# Altium PCB AnySkin.PcbDoc
Units mil, origin at the board's own origin, x right, y up, seen from the top; angles counter-clockwise.
Board outline 1025 x 1725 mil, 2 copper layers (Top Layer, Bottom Layer); 41 components, 20 nets, 191 pads, 66 vias.
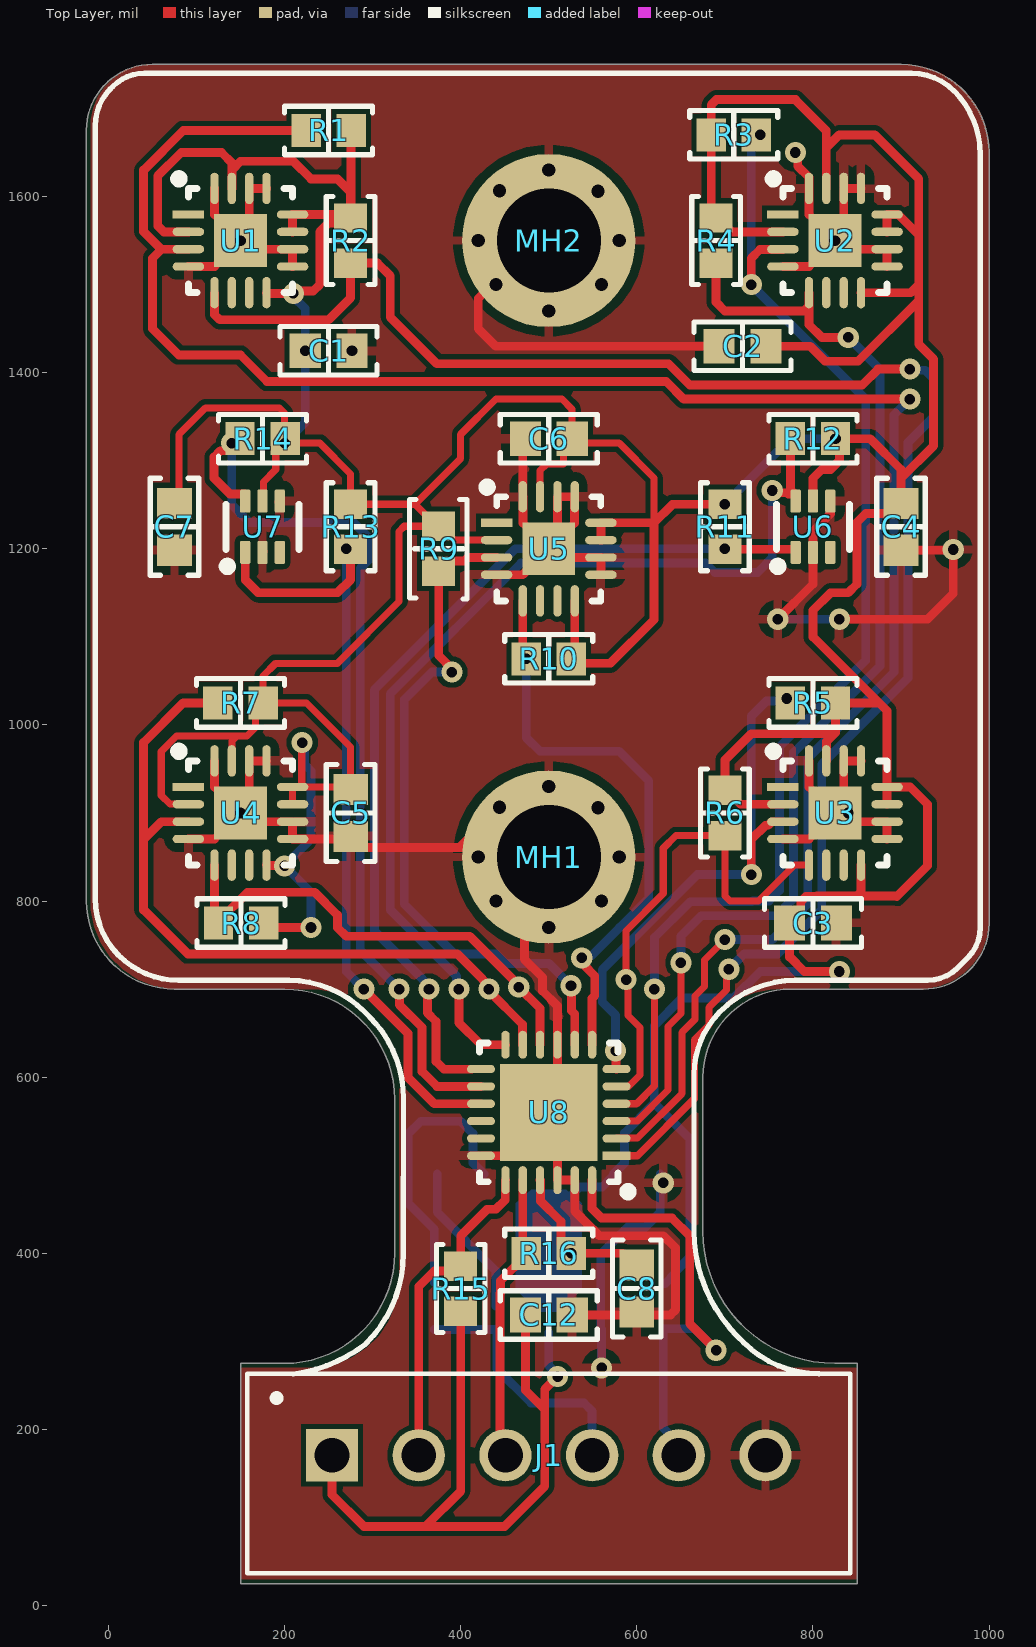
[diagram p0: Top Layer view]
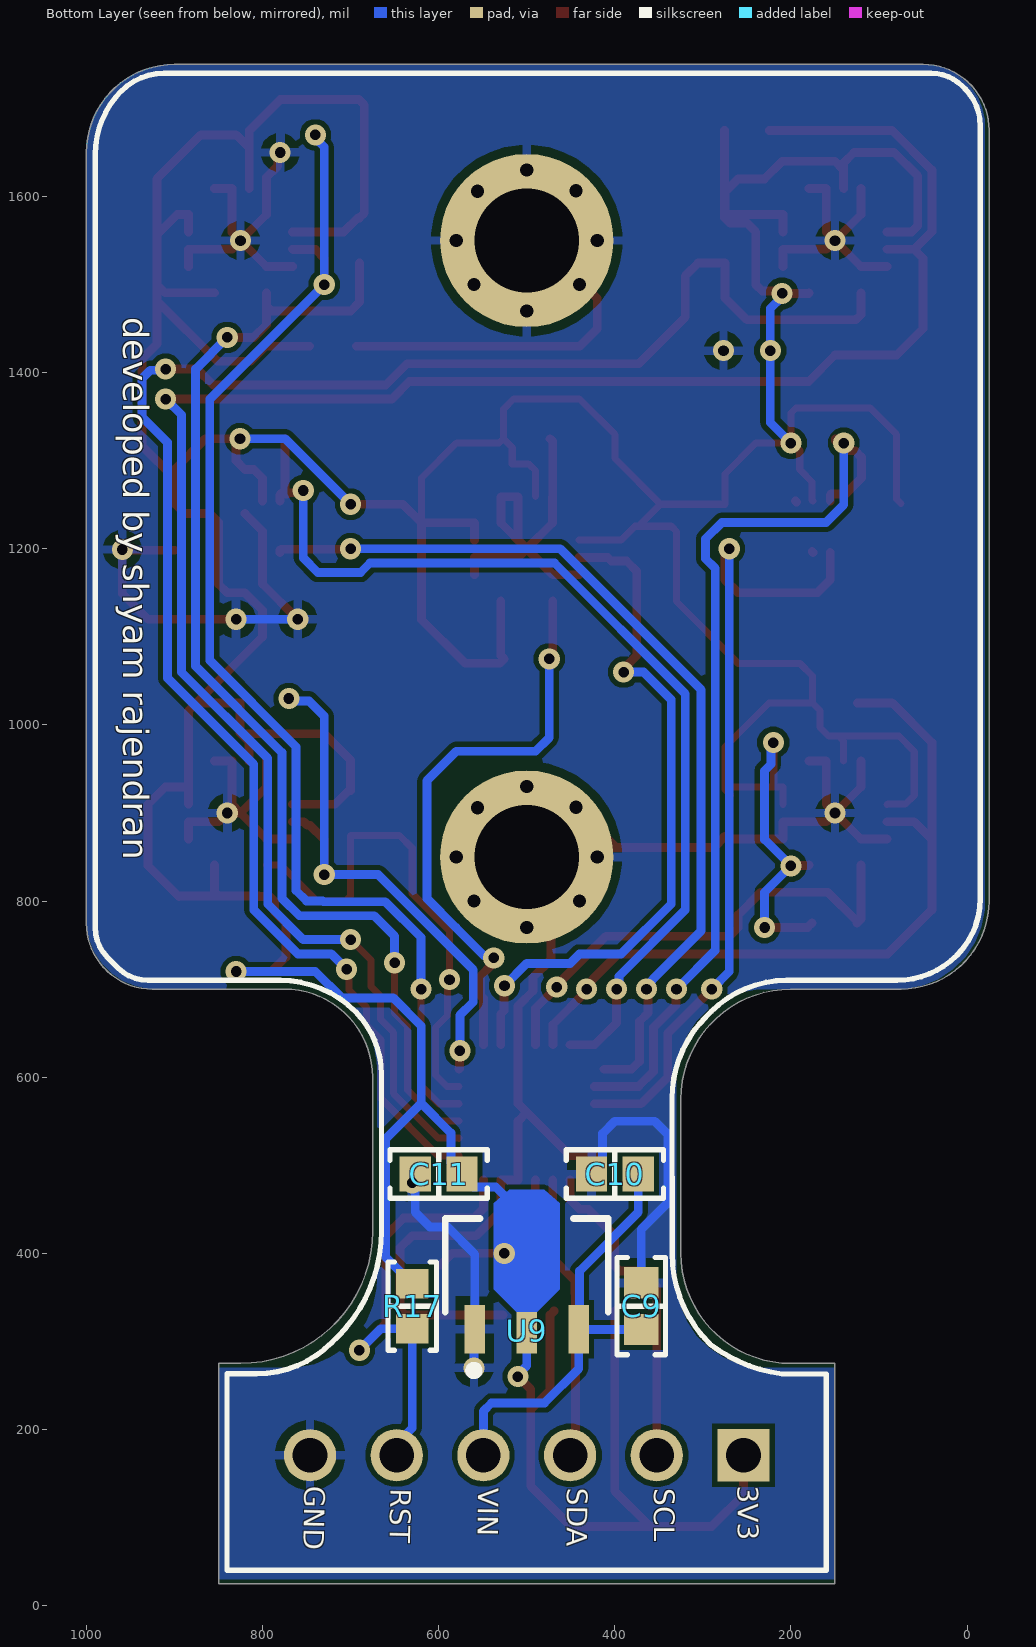
[diagram p1: Bottom Layer view, seen from below]
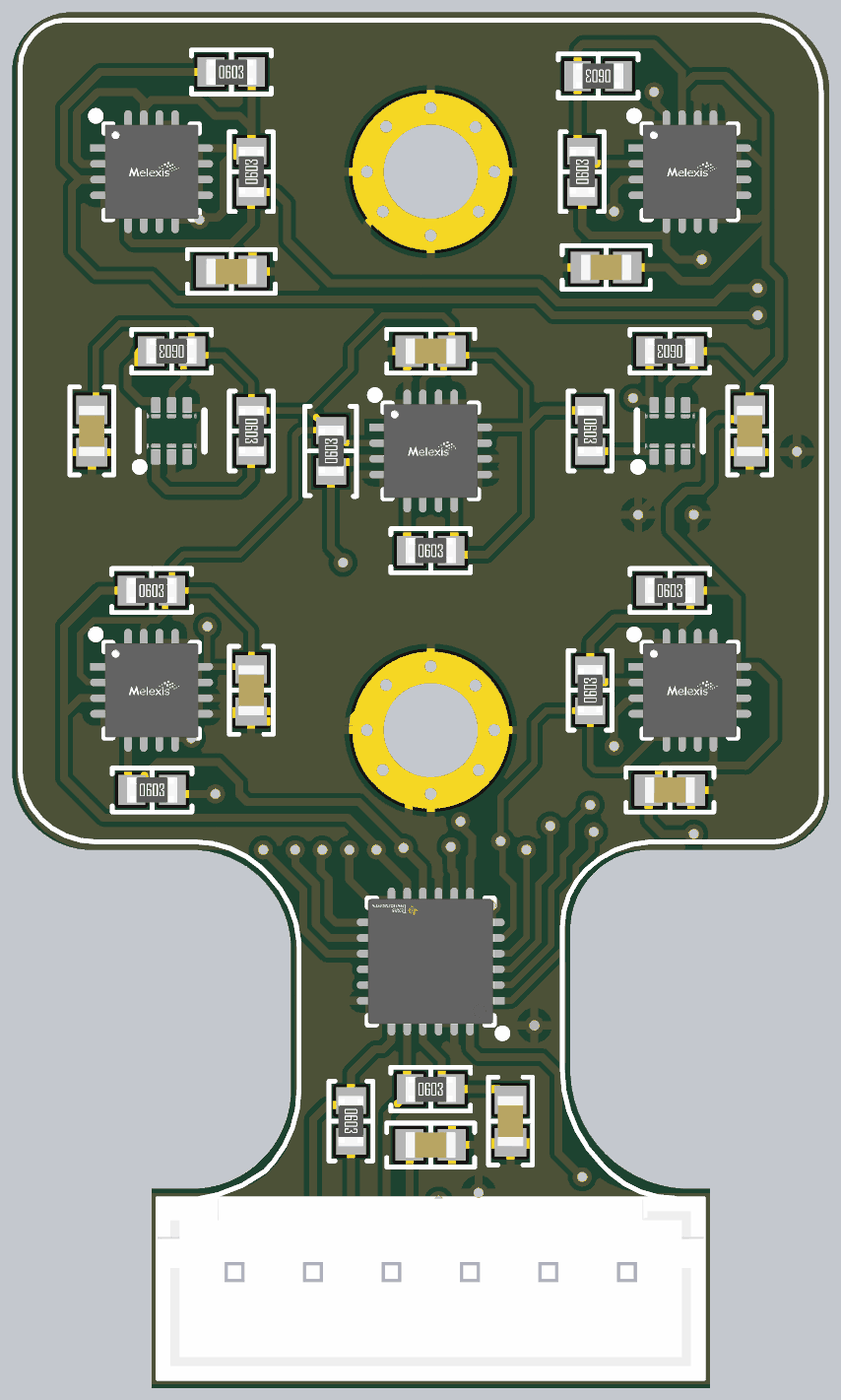
[diagram p2: 3D render of the assembled board from above, using the file's embedded part models]
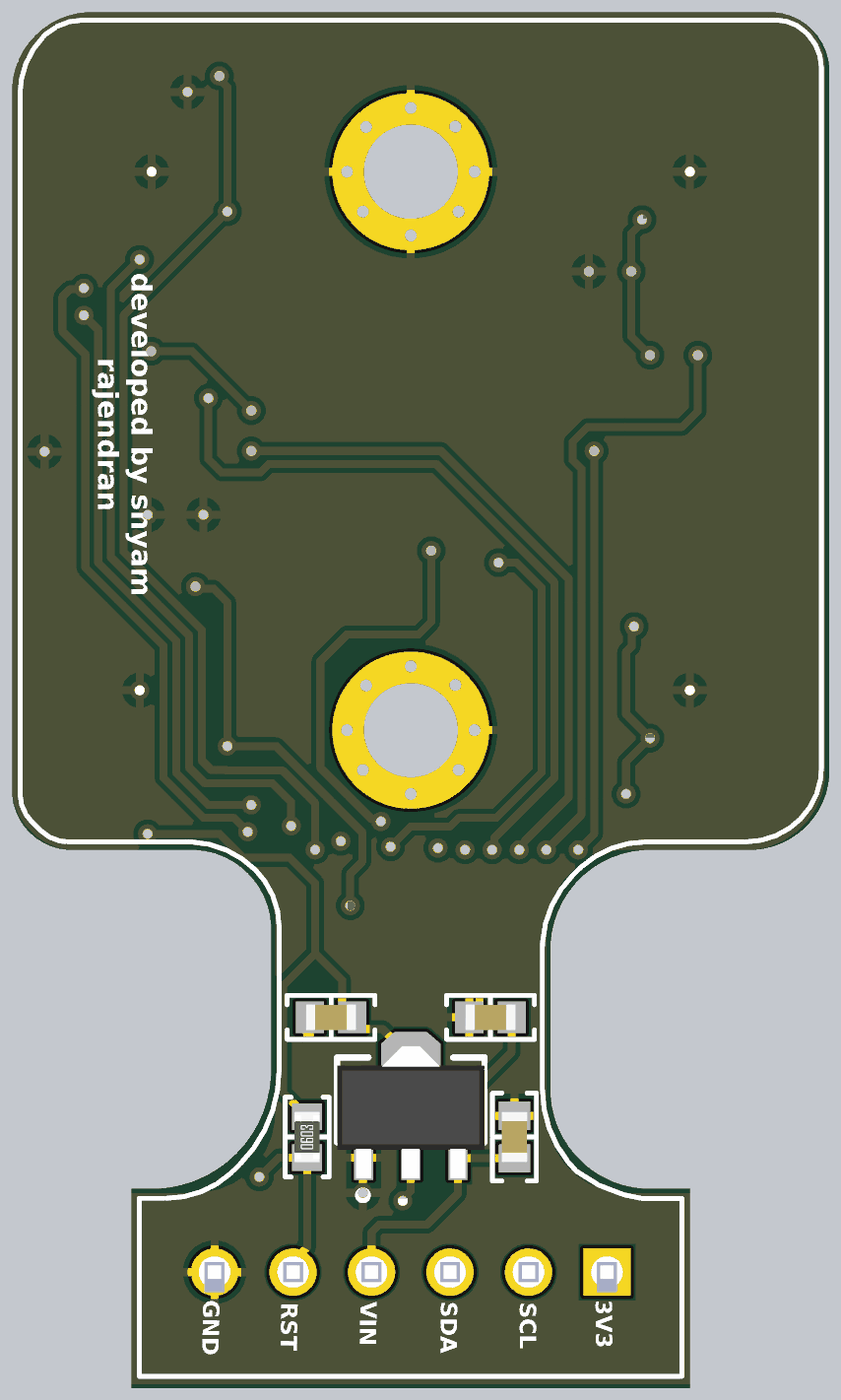
[diagram p3: 3D render of the assembled board from below, using the file's embedded part models]

## Layer stack, top to bottom
Top Solder: solder mask 0.4, Solder Resist, Dk 3.5
Top Layer: signal copper 1.4
Dielectric 1: dielectric 12.6, FR-4, Dk 4.8
Bottom Layer: signal copper 1.4
Bottom Solder: solder mask 0.4, Solder Resist, Dk 3.5

## Board outline
200,275 150,275 150,25 850,25 850,275 825,275 cw(c825,425) 675,425 675,600 cw(c775,600) 775,700 925,700 ccw(c925,775) 1000,775 1000,1650 ccw(c900,1650) 900,1750 50,1750 ccw(c50,1675) -25,1675 -25,800 ccw(c75,800) 75,700 200,700 cw(c200,575) 325,575 325,400 cw(c200,400)

## Design rules (kind name [scope] priority, off if disabled: settings)
Clearance [All] p1: gap=6 ignorepadtopadclearanceinfootprint=TRUE
HoleSize [All] p1: absolutevalues=TRUE maxlimit=236.22 minlimit=0.98 maxpercent=80.000 minpercent=20.000
MinimumSolderMaskSliver MinimumSolderMaskSliver_1 [All] p1: minsoldermaskwidth=10
MinimumSolderMaskSliver "QFN relaxation" [InRoom('SliverRoom')] p2: minsoldermaskwidth=6
PolygonConnect [All] p1: connectstyle=Relief reliefconductorwidth=10 reliefentries=4 polygonreliefangle="90 Angle" airgapwidth=10
RoomDefinition SliverRoom [False] p1: confinementstyle=ConfineIn formatcopy=TRUE lockcomponents=FALSE outline 398,662 604,662 604,451 398,451
RoutingVias [All] p1: holewidth=24 width=24 viastyle="Through Hole" minholewidth=12 minwidth=20 maxholewidth=13 maxwidth=40
SilkToSolderMaskClearance [IsPad] p1: minsilkscreentomaskgap=5.9 clearancetoexposedcopper=TRUE
SolderMaskExpansion [All] p1: expansion=4 istentingtop=FALSE
SupplyNets "Schematic Supply Nets_2" [InNet('VIN')] p1: voltage=0.000
SupplyNets "Schematic Supply Nets_1" [InNet('GND')] p2: voltage=0.000
SupplyNets "Schematic Supply Nets" [InNet('+3V3')] p3: voltage=0.000
Width [All] p1: maxlimit=20 minlimit=8 preferedwidth=10
27 further rules are at their usual default settings.

## Classes and differential pairs
component class "Sensor Suite": C1 C2 C3 C4 C5 C6 C7 R1 R2 R3 R4 R5 R6 R7 R8 R9 R10 R11 R12 R13 R14 U1 U2 U3 U4 U5 U6 U7
component class Interface: C8 C9 C10 C11 C12 J1 MH1 MH2 R15 R16 R17 U8 U9

## Components (designator, comment, footprint, x,y, rotation, side; value= is the part's Value field where it differs from the comment)
C1 "10uF" "CAP 0603_1608" 250,1425 r180 top value="3.3 µF"
C2 "10uF" "CAP 0603_1608" 720,1430 r0 top value="3.3 µF"
C3 "10uF" "CAP 0603_1608" 800,775 r180 top value="3.3 µF"
C4 "10uF" "CAP 0603_1608" 900,1225 r90 top value="3.3 µF"
C5 "10uF" "CAP 0603_1608" 275,900 r90 top value="3.3 µF"
C6 "10uF" "CAP 0603_1608" 500,1325 r0 top value="3.3 µF"
C7 "10uF" "CAP 0603_1608" 75,1225 r90 top value="3.3 µF"
C8 "10uF" "CAP 0603_1608" 600,360 r90 top value="3.3 µF"
C9 "10uF" "CAP 0603_1608" 370,340 r270 bottom value="3.3 µF"
C10 "10uF" "CAP 0603_1608" 400,490 r180 bottom value="3.3 µF"
C11 "10uF" "CAP 0603_1608" 600,490 r180 bottom value="3.3 µF"
C12 "10uF" "CAP 0603_1608" 500,330 r180 top value="3.3 µF"
J1 "B6B-XH-A(LF)(SN)" JST_B6B-XH-A(LF)(SN) 500,150 r180 top locked
MH1 "PMH 3.0" NPMH 500,850 r0 top
MH2 "PMH 3.0" NPMH 500,1550 r0 top
R1 "10k" "RES 0603_1608" 250,1675 r0 top
R2 "10k" "RES 0603_1608" 275,1550 r90 top
R3 "10k" "RES 0603_1608" 710,1670 r180 top
R4 "10k" "RES 0603_1608" 690,1550 r90 top
R5 "10k" "RES 0603_1608" 800,1025 r0 top
R6 "10k" "RES 0603_1608" 700,900 r90 top
R7 "10k" "RES 0603_1608" 150,1025 r0 top
R8 "10k" "RES 0603_1608" 150.59,775 r0 top
R9 "10k" "RES 0603_1608" 375,1200 r90 top
R10 "10k" "RES 0603_1608" 500,1075 r0 top
R11 "5.1K" "RES 0603_1608" 700,1225 r270 top value=5.1k
R12 "5.1K" "RES 0603_1608" 800,1325 r180 top value=5.1k
R13 "5.1K" "RES 0603_1608" 275,1225 r270 top value=5.1k
R14 "5.1K" "RES 0603_1608" 175,1325 r180 top value=5.1k
R15 "5.1K" "RES 0603_1608" 400,360 r270 top value=5.1k
R16 "5.1K" "RES 0603_1608" 500,400 r0 top value=5.1k
R17 "5.1K" "RES 0603_1608" 630,340 r90 bottom value=5.1k
U1 "MLX90393" MLX90393 150,1550 r0 top
U2 "MLX90393" MLX90393 825,1550 r0 top
U3 "MLX90393" MLX90393 825,900 r0 top
U4 "MLX90393" MLX90393 150,900 r0 top
U5 "MLX90393" MLX90393 500,1200 r0 top
U6 "TMP102" TMP102 800,1225 r90 top
U7 "TMP102" TMP102 175,1225 r90 top
U8 "TCA9548ARGERQ1" TCA9548 500,560 r180 top
U9 "AMS1117-3V3" "AMS1117, 5V" 500,376.93 r90 bottom locked

## Footprints (in the part's own frame and the unit in brackets; to place one, negate y for a bottom-side part, rotate by r counter-clockwise, add the part's x,y. Pads: shape width x height; smd on the part's side, far side on the other; paste and mask are expansions set on the pad)
"AMS1117, 5V" [mm] "SOT89"
  rect 1.4x0.6 smd: 1(-1.6,1.5) 3(-1.6,-1.5)
  rect 1.2x0.6 smd: 2(-1.7,0)
  Top Layer region: -1.1,0.3 -0.45,0.95 2.032,0.95 2.413,0.508 2.413,-0.508 2.032,-0.95 -0.45,-0.95 -1.1,-0.3
  silkscreen extent -2.92,-2.35 1.6,2.35, body extent -2.25,-2.35 1.95,2.35, height 1.6
"CAP 0603_1608" [mm] "Chip Capacitor, 2-Leads, Body 1.60x0.80mm, IPC Medium Density"
  rect 0.9x1 smd: 1(-0.675,0) 2(0.675,0)
  silkscreen extent -1.4,-0.7 1.4,0.7, body extent -0.8,-0.41 0.8,0.41, height 0.82
JST_B6B-XH-A(LF)(SN) [mm]
  rect 1.508x1.508 / inner round 1.508 / far side rect 1.508x1.508 hole 1: 1(6.25,-0.525)
  round 1.508 hole 1: 2(3.75,-0.525) 3(1.25,-0.525) 4(-1.25,-0.525) 5(-3.75,-0.525) 6(-6.25,-0.525)
  silkscreen extent -8.7,-2.88 8.7,2.88, body extent -8.7,-2.88 8.7,2.88, height 7
MLX90393 [mm] "QFN"
  rect 0.906x0.239 smd paste+0 mask+0: 1(-1.503,0.75)
  rrect100% 0.906x0.239 smd paste+0 mask+0: 2(-1.503,0.25) 3(-1.503,-0.25) 4(-1.503,-0.75) 9(1.503,-0.75) 10(1.503,-0.25) 11(1.503,0.25) 12(1.503,0.75)
  rrect100% 0.239x0.906 smd paste+0 mask+0: 5(-0.75,-1.503) 6(-0.25,-1.503) 7(0.25,-1.503) 8(0.75,-1.503) 13(0.75,1.503) 14(0.25,1.503) 15(-0.25,1.503) 16(-0.75,1.503)
  rect 1.524x1.524 smd paste-1000 mask+0: 17(0,0)
  silkscreen extent -1.9,-1.5 1.5,1.9, body extent -2.46,-2.46 2.46,2.46, height 0.25
NPMH [mm] "3.5mm"
  round 5 hole 3: GND(0,0)
"RES 0603_1608" [mm] "Chip Resistor, 2-Leads, Body 1.60x0.80mm, IPC Medium Density"
  rect 0.85x0.95 smd: 1(-0.65,0) 2(0.65,0)
  silkscreen extent -1.27,-0.7 1.27,0.7, body extent -0.8,-0.4 0.8,0.4, height 0.45
TCA9548 [mm] "QFN"
  rect 0.806x0.239 smd paste+0 mask+0: 1(-1.953,1.25)
  rrect100% 0.806x0.239 smd paste+0 mask+0: 2(-1.953,0.75) 3(-1.953,0.25) 4(-1.953,-0.25) 5(-1.953,-0.75) 6(-1.953,-1.25) 13(1.953,-1.25) 14(1.953,-0.75) 15(1.953,-0.25) 16(1.953,0.25) 17(1.953,0.75) 18(1.953,1.25)
  rrect100% 0.239x0.806 smd paste+0 mask+0: 7(-1.25,-1.953) 8(-0.75,-1.953) 9(-0.25,-1.953) 10(0.25,-1.953) 11(0.75,-1.953) 12(1.25,-1.953) 19(1.25,1.953) 20(0.75,1.953) 21(0.25,1.953) 22(-0.25,1.953) 23(-0.75,1.953) 24(-1.25,1.953)
  rect 2.8x2.8 smd paste-1000 mask+0: 25(0,0)
  silkscreen extent -2.41,-2 2,2.41, body extent -2.61,-2.61 2.61,2.61, height 0.25
TMP102 [mm] "SOT563"
  rrect33% 0.67x0.3 smd paste+0 mask+0: 1(-0.74,0.5) 2(-0.74,0) 3(-0.74,-0.5) 4(0.74,-0.5) 5(0.74,0) 6(0.74,0.5)
  silkscreen extent -1.27,-1.05 0.65,1.14, body extent -1.17,-1.1 1.17,1.1, height 0.25

## Part data
C1 C2 C3 C4 C5 C6 C7 C8 C9 C12: library part GCJ188C70J335KE02D, "0603", Capacitance=0.1uF, Device Package="0603 (1608 Metric)", Manufacturer="Murata Electronics", Operating Temperature="-55°C ~ 125°C", Ratings=AEC-Q200, Supplier Part Number 1=490-GCJ188C70J335KE02DCT-ND, Temperature Coefficient=X7S, Tolerance=±10%, Voltage - Rated=6.3V, Applications="Automotive, Boardflex Sensitive", ComponentLink1Description=Datasheet, ComponentLink1URL=https://search.murata.co.jp/Ceramy/image/img/A01X/G101/ENG/GCJ188C70J335KE02-01A.pdf, ComponentLink2Description="DigiKey Link", ComponentLink2URL=https://www.digikey.com/en/products/detail/murata-electronics/GCJ188C70J335KE02D/10696585, Features="Soft Termination", lastupdated="09-02-2024 20:08:53", Lifecycle Status=Active, Minimum Order=1, Mounting Type="Surface Mount, MLCC", Package / Case="0603 (1608 Metric)", Packaging=TapeAndReel, Part Number=GCJ188C70J335KE02D, Part Status=Active, partid=55427, Price=0.04, Series=GCJ, Size / Dimension="0.063\" L x 0.031\" W (1.60mm x 0.80mm)", Supplier 1=DigiKey, Thickness (Max)="0.039\" (1.00mm)"
C10 C11: library part GCJ188C70J335KE02D, "0603", Device Package="0603 (1608 Metric)", Manufacturer="Murata Electronics", Operating Temperature="-55°C ~ 125°C", Ratings=AEC-Q200, Supplier Part Number 1=490-GCJ188C70J335KE02DCT-ND, Temperature Coefficient=X7S, Tolerance=±10%, Voltage - Rated=6.3V, Applications="Automotive, Boardflex Sensitive", Capacitance=10uF, ComponentLink1Description=Datasheet, ComponentLink1URL=https://search.murata.co.jp/Ceramy/image/img/A01X/G101/ENG/GCJ188C70J335KE02-01A.pdf, ComponentLink2Description="DigiKey Link", ComponentLink2URL=https://www.digikey.com/en/products/detail/murata-electronics/GCJ188C70J335KE02D/10696585, Features="Soft Termination", lastupdated="09-02-2024 20:08:53", Lifecycle Status=Active, Minimum Order=1, Mounting Type="Surface Mount, MLCC", Package / Case="0603 (1608 Metric)", Packaging=TapeAndReel, Part Number=GCJ188C70J335KE02D, Part Status=Active, partid=55427, Price=0.04, Series=GCJ, Size / Dimension="0.063\" L x 0.031\" W (1.60mm x 0.80mm)", Supplier 1=DigiKey, Thickness (Max)="0.039\" (1.00mm)"
J1: "Connector Header Through Hole 6 position 0.098 (2.50mm)", Package=None, Check_prices=https://www.snapeda.com/parts/B6B-XH-A(LF)(SN)/JST+Sales+America+Inc./view-part/?ref=eda, MF="JST Sales", MP=B6B-XH-A(LF)(SN), SnapEDA_Link=https://www.snapeda.com/parts/B6B-XH-A(LF)(SN)/JST+Sales+America+Inc./view-part/?ref=snap
MH1 MH2: library part PMH, "PMH 3.0mm"
R1 R2 R3 R4 R5 R6 R7 R8 R9 R10: library part RNCS0603BKE10K0, "RES 10K OHM 0.1% 1/16W 0603", Device Package="0603 (1608 Metric)", Manufacturer="Stackpole Electronics Inc", Operating Temperature="-55°C ~ 155°C", Power (Watts)="0.063W, 1/16W", Ratings=AEC-Q200, Resistance="10 kOhms", Supplier Device Package=0603, Supplier Part Number 1=RNCS0603BKE10K0CT-ND, Temperature Coefficient=±25ppm/°C, Tolerance=±0.1%, ComponentLink1Description=Datasheet, ComponentLink1URL=https://www.seielect.com/catalog/sei-rncs_rnch.pdf, ComponentLink2Description="DigiKey Link", ComponentLink2URL=https://www.digikey.com/en/products/detail/stackpole-electronics-inc/RNCS0603BKE10K0/1708836, Composition="Thin Film", Features="Anti-Corrosive, Automotive AEC-Q200, Moisture Resistant", Height - Seated (Max)="0.022\" (0.55mm)", lastupdated="09-02-2024 20:43:37", Lifecycle Status=Active, Minimum Order=1, Number of Terminations=2, Package / Case="0603 (1608 Metric)", Packaging=TapeAndReel, Part Number=RNCS0603BKE10K0, Part Status=Active, partid=4838, Price=0.06, Series=RNCS, Size / Dimension="0.061\" L x 0.031\" W (1.55mm x 0.80mm)", Supplier 1=DigiKey
R11 R12 R13 R14 R15 R16 R17: library part RNCS0603BKE10K0, "0603", Device Package="0603 (1608 Metric)", Manufacturer="Stackpole Electronics Inc", Operating Temperature="-55°C ~ 155°C", Power (Watts)="0.063W, 1/16W", Ratings=AEC-Q200, Resistance="10 kOhms", Supplier Part Number 1=RNCS0603BKE10K0CT-ND, Temperature Coefficient=±25ppm/°C, Tolerance=±0.1%, ComponentLink1Description=Datasheet, ComponentLink1URL=https://www.seielect.com/catalog/sei-rncs_rnch.pdf, ComponentLink2Description="DigiKey Link", ComponentLink2URL=https://www.digikey.com/en/products/detail/stackpole-electronics-inc/RNCS0603BKE10K0/1708836, Composition="Thin Film", Features="Anti-Corrosive, Automotive AEC-Q200, Moisture Resistant", Height - Seated (Max)="0.022\" (0.55mm)", lastupdated="09-02-2024 20:43:37", Lifecycle Status=Active, Minimum Order=1, Number of Terminations=2, Package / Case="0603 (1608 Metric)", Packaging=TapeAndReel, Part Number=RNCS0603BKE10K0, Part Status=Active, partid=4838, Price=0.06, Series=RNCS, Size / Dimension="0.061\" L x 0.031\" W (1.55mm x 0.80mm)", Supplier 1=DigiKey, Supplier Device Package=0603
U1 U2 U3 U4 U5: library part MLX90393ELW-ABA-011-RE, "Analog Circuit, 1 Func", Case/Package=VQCCN, Manufacturer=Melexis, Max Operating Temperature=85°C, Max Supply Voltage=3.6V, Min Operating Temperature=-40°C, Min Supply Voltage=2.2V, Nominal Supply Voltage=3V, Package Shape=Square, Package Style="CHIP CARRIER, VERY THIN PROFILEMeter", Supplier Part Number=MLX90393ELW-ABA-011-RECT-ND, Temperature Grade=INDUSTRIAL, Category="Magnetic Sensors", Channels=1, ComponentLink1Description=https://datasheet.ciiva.com:443/pdfs/VipMasterIC/IC/MELE/MELE-S-A0009883443/MELE-S-A0009883443-1.pdf?src-supplier=IHS+Markit, ComponentLink1URL=https://datasheet.ciiva.com:443/pdfs/VipMasterIC/IC/MELE/MELE-S-A0009883443/MELE-S-A0009883443-1.pdf?src-supplier=IHS+Markit, ComponentLink2Description=https://www.melexis.com/-/media/files/documents/application-notes/mlx90393-application-note-melexis.pdf?src-supplier=Digikey, ComponentLink2URL=https://www.melexis.com/-/media/files/documents/application-notes/mlx90393-application-note-melexis.pdf?src-supplier=Digikey, ComponentLink3Description=https://www.melexis.com/-/media/files/documents/datasheets/mlx90393-datasheet-melexis.pdf?src-supplier=Digikey, ComponentLink3URL=https://www.melexis.com/-/media/files/documents/datasheets/mlx90393-datasheet-melexis.pdf?src-supplier=Digikey, ComponentLink4Description=https://datasheet.octopart.com/MLX90393ELW-ABA-011-RE-Melexis-datasheet-62983775.pdf?src-supplier=Future+Electronics, ComponentLink4URL=https://datasheet.octopart.com/MLX90393ELW-ABA-011-RE-Melexis-datasheet-62983775.pdf?src-supplier=Future+Electronics, Height - Seated (Max)=1mm, JESD-30 Code=S-XQCC-N16, Length=3mm, Manufacturer Part Number=MLX90393ELW-ABA-011-RE, Pins=16, Pricing="1=2.21, 5=1.964, 10=1.872, 25=1.7632, 50=1.689, 100=1.6211, 500=1.48448, 1000=1.43365 (USD)", Reach SVHC Compliant=Yes, RoHS=Yes, RoHS Compliant=Yes, Stock=37550, Supplier=Digikey, Surface Mount=Yes, Terminal Finish=Tin, Terminal Form="No Lead", Terminal Pitch=0.5mm, Terminal Position=QUAD, Throw Configuration="ANALOG CIRCUIT", Width=3mm
U6 U7: "SENSOR DIGITAL -40C-125C SOT563", Case/Package=SOT-563, Max Operating Temperature=125°C, Max Supply Voltage=3.6V, Min Operating Temperature=-40°C, Min Supply Voltage=1.4V, Nominal Supply Current=85uA, Operating Supply Current=1uA, Output Current=3mA, Package Quantity=4000, Quiescent Current=10uA, Interface=I2C, Lead Free="Lead Free", Max Supply Voltage (DC)=3.6V, Min Supply Voltage (DC)=1.4V, Mount="Surface Mount", Number of Bits=12, Number of Pins=6, Output Type=Digital, Packaging="Tape and Reel", Radiation Hardening=No, REACH SVHC="No SVHC", Resolution=12b, RoHS Compliant=Yes, Series=-, Supply Current=85uA, Weight=9.9E-05oz
U8: "I2C Switch with Reset 8 Channel Bi-Directional 1.65V to 5.25V 24-Pin VQFN Cut Tape", Case/Package=VQFN, Max Operating Temperature=85°C, Max Supply Voltage=5.25V, Min Operating Temperature=-40°C, Min Supply Voltage=1.65V, ComponentLink1Description=http://www.winbond.com/resource-files/w25q128jv%20revf%2003272018%20plus.pdf?src-supplier=Digikey, ComponentLink2Description=http://www.winbond.com/resource-files/w25q128jv%20spi%20revc%2011162016.pdf?src-supplier=Digikey, ComponentLink3Description=https://datasheet.ciiva.com:443/pdfs/VipMasterIC/IC/WBND/WBND-S-A0002933800/WBND-S-A0002933800-1.pdf?src-supplier=IHS+Markit, Length=4mm, Pins=24, RoHS=Compliant, Width=4mm
U9: "SOT89"

## Via types
v1: diameter 24, hole 12, Top Layer to Bottom Layer, tented both sides, 50 vias
v2: diameter 20, hole 15, Top Layer to Bottom Layer, tented both sides, 16 vias

## Nets (pads, with @x,y where several pads share a name; then routed paths per layer and width w, separated by ;. In a path a pad name is that pad's centre, name@x,y a point inside that pad or via, vN(x,y) a via of type N, cw(c..) or ccw(c..) an arc to the next point about the centre after c; other vN are vias at no path point)
+3V3: C1.2 C2.2 C3.2 C4.2 C5.2 C6.2 C7.2 C8.2 C11.2 C12.2 J1.1 R1.2 R2.2 R3.2 R4.2 R5.2 R6.2 R7.2 R8.2 R9.2 R10.2 R11.1 R12.1 R13.1 R14.1 R15.2 R16.2 R17.2 U1.2 U1.8 U1.11 U1.12 U1.15 U2.2 U2.8 U2.11 U2.12 U2.15 U3.2 U3.8 U3.11 U3.12 U3.15 U4.2 U4.8 U4.11 U4.12 U4.15 U5.2 U5.8 U5.11 U5.12 U5.15 U6.5 U7.5 U8.21 U9.2 | length 8531.8
  Top Layer w8: C7.2 80,1256.57 80,1330 110,1360 194.14,1360 200,1354.14 v1(200,1320) ; U4.2 90.54,910.13 69.87,910.13 60,920 60,970 77.51,987.51 146.02,987.51 ; U4.15 140.16,981.65 146.02,987.51 ; U7.5 175.91,1255.04 175.91,1275.91 190,1290 190,1311.3 198.7,1320 v1(200,1320) ; U4.11 U4.12 U4.12@219.53,929.53 ; v1(220,980) 219.53,979.53 U4.12@219.53,929.53 ; C5.2@268.43,920 C5.2 ; R9.2 376.97,1225.59 392.72,1209.84 U5.2 U5.2@440.54,1210.13 ; U5.15 490.16,1288.77 497.86,1296.48 516.48,1296.48 516.48,1314.91 C6.2 ; 619.53,1229.53 619.53,1280.47 580,1320 531.57,1320 C6.2 ; 146.02,987.51 157.51,987.51 167.16,997.16 167.16,1016.57 R7.2 ; R7.2 175.59,1055.59 190,1070 260,1070 330,1140 330,1219.73 335.86,1225.59 373.03,1225.59 348.03,1250.59 ; R7.2 225,1025 275,975 C5.2 ; v1(200,1320) 240,1320 275,1285 R13.1 348.03,1250.59 ; U4.12@219.53,929.53 272.05,929.53 C5.2 ; 348.03,1250.59 400,1302.56 400,1330 440,1370 515.06,1370 526.57,1358.48 C6.2
  Top Layer w10: U1.2 62.78,1559.84 56,1566.63 56,1623.37 82.63,1650 128.37,1650 140.45,1637.93 140.45,1630.45 ; U1.15 140.45,1609.46 140.45,1630.45 ; R8.2 181.18,770 v1(230,770) ; U4.8 179.53,840.7 179.82,840.41 199.59,840.41 v1(200,840) v1@200.07,840.07 ; U1.8 179.53,1490.29 179.82,1490 v1(210,1490) 212.68,1492.68 232.68,1492.68 240,1500 240,1560 250,1570 269.41,1570 R2.2 ; U1.11 U1.12 271.06,1579.53 R2.2 ; J1.1 253.94,126.06 290,90 360,90 ; R2.2@275,1579.53 275,1605 260,1620 230,1620 210,1640 150,1640 140.45,1630.45 ; R1.2 275.59,1576.18 R2.2 ; R15.2 400,130 360,90 ; C12.2@469.02,334.41 C12.2 473.43,244.76 495.47,222.71 ; U8.21 490.45,482.82 490.45,459.55 513.86,436.14 513.86,411.73 v1(525.59,400) 584.61,400 598.03,386.57 C8.2 ; v1(510,260) 495.47,245.47 495.47,222.71 ; U5.8 529.53,1078.94 R10.2 530.59,1070 570,1070 619.53,1119.53 619.53,1229.53 ; U5.11 U5.12 619.53,1229.53 ; R4.2 684.41,1581.18 R3.2 684.41,1704.14 690.27,1710 780,1710 815.16,1674.84 815.16,1655.16 ; R4.2@691.97,1575.59 707.72,1559.84 U2.2 ; R6.2 700,960 730,990 824.29,990 ; v1(700,1250.59) 640.59,1250.59 619.53,1229.53 ; R6.2@701.97,925.59 717.72,909.84 U3.2 ; C2.2 796.74,1430 813.74,1413 851.18,1413 920,1481.82 ; U6.5 800,1280 810,1290 820,1290 830,1300 830,1320.59 v1(825.59,1325) 865,1325 900,1290 900,1280 ; U3.15 815.45,959.46 815.45,981.16 824.29,990 ; U2.15 815.16,1655.16 ; v1(830,720) 790,720 773.43,736.57 C3.2 786.14,787.72 786.14,799.33 792,805.19 803.8,805.19 804.3,805.69 849.49,805.69 ; U3.8@854.24,840.54 U3.8 854.53,810.72 849.49,805.69 ; U2.8 910.83,1490.83 920,1500 ; U3.11 U3.12 ; U2.11 U2.12 896.72,1579.53 920,1556.25 ; 360,90 450,90 495.47,135.47 495.47,222.71 ; 815.16,1655.16 830,1670 870,1670 920,1620 920,1556.25 ; 824.29,990 825.59,991.3 R5.2 875,1025 ; 849.49,805.69 894.69,805.69 895.19,805.19 930,840 930,910 910.47,929.53 U3.12 ; 875,1025 800,1100 800,1130 820,1150 840,1150 850,1160 850,1230 860,1240 888.43,1240 C4.2 900,1280 ; 875,1025 884.17,1015.83 U3.12 ; 900,1280 937,1317 937,1415.18 920,1432.18 920,1481.82 ; 920,1481.82 920,1500 ; 920,1500 920,1556.25
  Bottom Layer w10: v1(200,1320) 223.43,1343.43 v1(223.43,1425) 223.43,1472.79 210,1486.21 v1(210,1490) ; v1(220,980) 222.68,977.32 222.68,955.32 230,948 230,870 v1(200,840) 230,810 v1(230,770) ; U9.2 500,272.33 510,262.33 v1(510,260) ; 500,440 535.31,475.31 560.71,475.31 573.43,488.03 C11.2 586.14,502.72 586.14,536.58 619.78,570.22 ; R17.2 631.97,365.59 643.7,377.32 643.7,379.29 660,395.59 660,530 619.78,570.22 ; v1(700,1250.59) 774.41,1325 v1(825.59,1325) ; v1(830,720) 740.09,720 710.09,690 651.62,690 619.78,658.17 619.78,570.22
GND: C1.1 C2.1 C3.1 C4.1 C5.1 C6.1 C7.1 C8.1 C9.1 C10.1 C11.1 C12.1 J1.6 MH1.GND MH2.GND U1.4 U1.9 U1.10 U1.13 U1.14 U1.16 U1.17 U2.4 U2.9 U2.10 U2.13 U2.14 U2.16 U2.17 U3.4 U3.9 U3.10 U3.13 U3.14 U3.16 U3.17 U4.4 U4.9 U4.10 U4.13 U4.14 U4.16 U4.17 U5.4 U5.9 U5.10 U5.13 U5.14 U5.16 U5.17 U6.2 U6.4 U7.2 U7.4 U8.9 U8.18 U8.22 U8.23 U8.25 U9.1 | length 5339.8
  Top Layer w10: U4.4 120.47,870.47 v1(150,900) ; U1.4 120.47,1520.47 v1(150,1550) ; U4.16 120.47,929.53 v1(150,900) ; U1.16 120.47,1579.53 v1(150,1550) ; U7.2 U7.2@175.91,1196.77 ; U4.13 U4.14 159.84,909.84 v1(150,900) ; U1.13 U1.14 159.84,1559.84 v1(150,1550) ; U7.4@193.78,1253.23 U7.4 ; U1.9 U1.10 159.84,1540.16 v1(150,1550) ; v2(420,850) MH1.GND ; U8.18 450.79,510.79 U8.25 ; v2(440,800) MH1.GND@450,800 ; U5.4 470.47,1170.47 U5.17 ; v2(444.16,1606.58) 420,1582.43 v2(420,1550) MH2.GND ; C6.1 470.47,1322.05 U5.16 470.76,1258.88 470.76,1229.24 U5.17 ; v2(500,1470) 530,1470 v2(560,1500) 556,1504 v2(556,1606) MH2.GND ; MH2.GND@500,1510 MH2.GND ; C12.1 638.14,330 644,335.86 644,406 630,420 557.37,420 529.53,447.85 U8.23 U8.22 509.84,550.16 U8.25 ; v2(556,906) 532,930 v2(500,930) MH1.GND ; U5.9 U5.10 509.84,1190.16 U5.17 ; v2(560,800) 550,800 MH1.GND ; C2.1 440,1430 420,1450 420,1484.14 437.93,1502.07 485.86,1550 MH2.GND ; v1(760,1120) 800,1160 U6.2 800,1220 820,1240 ; U3.4 795.47,870.47 U3.17 ; U2.4 795.47,1520.47 v1(825,1550) ; v1(780,1650) 782.68,1647.32 782.68,1634.51 795.47,1621.72 U2.16 795.47,1579.53 v1(825,1550) ; U3.16 795.47,929.53 U3.17 ; v1(830,1120) 930,1120 959.21,1149.21 v1(959.21,1199.21) ; U3.13 U3.14 834.84,909.84 U3.17 ; U2.13 U2.14 834.84,1559.84 v1(825,1550) ; U3.9 U3.10 849.84,890.16 v1(840,900) U3.17 ; U2.9 U2.10 834.84,1540.16 v1(825,1550) ; C4.1 958.43,1198.43 v1@960,1200 ; v1(150,900) 159.84,890.16 U4.10 U4.9 272.05,870.47 C5.1 287.72,860.71 398.28,860.71 ; 398.28,860.71 MH1.GND@489.29,860.71 ; 398.28,860.71 408.57,871 413.69,871 444.16,901.47 v2(444.16,906.58) 444.16,905.84 MH1.GND@489.29,860.71 ; MH1.GND@450,800 470,800 v2(500,770) 478.75,770 472.43,763.69 472.43,742.43 472.33,742.33 472.33,734.04 492.92,713.44 492.92,697.95 509.84,681.03 U8.9 509.84,569.84 U8.25 ; MH1.GND@450,800 MH1.GND ; MH1.GND@489.29,860.71 MH1.GND ; U5.17 529.24,1229.24 529.24,1258.88 U5.13 U5.14 509.84,1209.84 U5.17
  Bottom Layer w10: C9.1 370,427.37 340,457.37 340,535.14 354.86,550 400,550 413.86,536.14 413.86,502.72 C10.1 ; v1(560,270) 560,312.99 ccw(c559.06,312.99) U9.1 559.06,399.06 590,430 610,430 626.57,446.57 C11.1@626.57,480 ; C11.1 626.57,483.43 v1(630,480) ; v1(760,1120) v1(830,1120)
  other v1: 276.57,1425
  other v2: 580,850 440,1500 580,1550 500,1630
RESET: J1.5 R17.1 U8.24 | length 519.4
  Top Layer w10: U8.24 549.21,450.79 560,440 640,440 660,420 660,320 v1(690,290)
  Bottom Layer w10: J1.5 647.64,184.03 630,201.67 R17.1 665.59,314.41 v1(690,290)
SCL: J1.2 R15.1 U8.19 | length 373.4
  Top Layer w10: J1.2 352.36,362.36 370,380 394.41,380 R15.1 400,420 430,450 440,450 450.5,460.5 450.5,482.82 U8.19
SCL1: R1.1 U1.3 U8.2 | length 2342.2
  Top Layer w8: U8.2 577.16,530.74 U8.2@589.32,530.74 ; U8.2@589.34,530.76 600.76,530.76 651.26,581.26 651.26,651 666,665.74 666,692.12 677,703.12 677,733.28 v1(700,756.28)
  Top Layer w10: U1.3 59.84,1540.16 ; R1.1 85,1675 40,1630 40,1560 59.84,1540.16 ; v1(910,1370) 653.37,1370 633.37,1390 180,1390 150,1420 80,1420 50,1450 50,1530 59.84,1539.84 59.84,1540.16
  Bottom Layer w10: v1(700,756.28) 753.65,756.28 794,796.63 794,962 892,1060 892,1352 v1(910,1370)
SCL2: R3.1 U2.3 U8.4 | length 1411
  Top Layer w8: U8.4 599.84,569.84 620.26,590.26 620.26,664.74 620,665 v1(620,700)
  Top Layer w10: v1(730,1500) 730,1530 739.87,1539.87 765.54,1539.87 U2.3
  Bottom Layer w10: v1(620,700) 620,758.56 660.72,799.28 731.1,799.28 731.82,800 750,800 762,812 762,975.25 860,1073.25 860,1370 v1(730,1500) 730,1656.21 740,1666.21 v1(740,1670)
SCL3: R5.1 U3.3 U8.6 | length 646
  Top Layer w10: v1(575.92,630) 576.41,629.52 576.41,609.5 576.7,609.21 U8.6 ; v1(730,830) 730,869.99 746.19,886.18 749.3,886.18 753.28,890.16 U3.3
  Bottom Layer w10: v1(575.92,630) 575.92,670.27 560.74,685.45 560.74,721.94 668.81,830 v1(730,830) 730,1010 747.32,1027.32 767.32,1027.32 v1(770,1030)
SCL4: R9.1 U5.3 U8.8 | length 788.4
  Top Layer w10: v1(390,1060) 390,1063.79 375,1078.79 R9.1 386.73,1186.14 403.97,1186.14 407.99,1190.16 U5.3 ; v1(525.28,703.78) 525.84,703.21 525.84,675.45 529.52,671.78 U8.8
  Bottom Layer w10: v1(390,1060) 367.25,1060 336,1028.75 336,796.63 392.63,740 440,740 450.74,729.26 499.8,729.26 v1(525.28,703.78)
SCL5: R7.1 U4.3 U8.11 | length 863
  Top Layer w10: U4.3 60.16,890.16 40,870 ; R7.1 85,1025 40,980 40,870 ; U8.11 470.18,637.18 470.18,659.82 432,698 v1(432,700) 432,703.79 425,710.79 425,711.18 396.18,740 90,740 40,790 40,870
SCL6: R11.2 U6.1 U8.13 | length 1044.1
  Top Layer w10: v1(364,700) 362.18,698.17 362.18,673.08 372,663.25 372,618 381.08,608.92 U8.13@412.24,608.92 ; R11.2 779.41,1199.41 780.31,1198.5 U6.1
  Bottom Layer w10: v1(364,700) 364,703.79 357,710.79 357,711.18 302,766.18 302,1040 462,1200 v1(700,1200)
SCL7: R13.2 U7.1 U8.15 | length 922.2
  Top Layer w10: U7.1 155.32,1164.68 170,1150 260,1150 275,1165 R13.2 ; v1(290,700) 340,650 340,600 370.16,569.84 U8.15
  Bottom Layer w10: v1(270,1200) 270,720 v1(290,700)
SDA: J1.3 R16.1 U8.20 | length 343.6
  Top Layer w10: J1.3@441.34,180.12 J1.3 ; J1.3@449.85,171.6 J1.3 ; U8.20 470.47,403.94 R16.1 474.41,398.03 445.21,368.83 445.21,354.74 444.71,354.24 444.71,176.75 J1.3
SDA1: R2.1 U1.5 U8.1 | length 2058.1
  Top Layer w8: U8.1 600.59,510.79 665.26,575.46 665.26,642.37 682,659.12 682,679.37 701.8,699.17 701.8,719.9 v1(704.48,722.58)
  Top Layer w10: U1.5 120.47,1465.86 126.33,1460 250,1460 275,1485 R2.1 305.59,1524.41 320,1510 320,1463 373,1410 636,1410 660,1386 856,1386 874,1404 v1(910,1404)
  Bottom Layer w10: v1(704.48,722.58) 721.9,740 760,740 810,790 810,955.37 908,1053.37 908,1321 937,1350 937,1393 927.32,1402.68 911.32,1402.68 v1(910,1404)
SDA2: R4.1 U2.5 U8.3 | length 1335.2
  Top Layer w8: U8.3 577.16,550.43 U8.3@589.32,550.43 ; U8.3@589.34,550.45 600.45,550.45 635.26,585.26 635.26,657.63 650,672.37 v1(650,730)
  Top Layer w10: R4.1 690,1480 700,1470 789.61,1470 U2.5@795.47,1475.86 ; U2.5 U2.5@795.47,1475.86 ; v1(840,1440) 810,1440 795.47,1454.53 U2.5@795.47,1475.86
  Bottom Layer w10: v1(650,730) 650,760 673.28,783.28 758.03,783.28 778,803.25 778,968.63 876,1066.63 876,1404 v1(840,1440)
SDA3: R6.1 U3.5 U8.5 | length 573.1
  Top Layer w8: U8.5 590.58,589.53 603.76,602.71 603.76,656.24 590,670 590,708.5 v1(587.74,710.75) 587.74,766.14 630,808.4 630,860 644.41,874.41 R6.1 700,805.86 705.86,800 738.18,800 779.01,840.83 U3.5
SDA4: R10.1 U5.5 U8.7 | length 659.8
  Top Layer w10: U5.5 470.47,1078.94 v1(474.41,1075) ; v1(537.42,735.54) 540.1,732.86 540.1,727.14 552.28,714.96 552.28,692.6 549.21,689.53 U8.7
  Bottom Layer w10: v1(474.41,1075) 474.41,985.59 490,970 580,970 613.43,936.57 613.43,803.02 580.27,769.86 548.62,738.21 540.1,738.21 v1(537.42,735.54)
SDA5: R8.1 U4.5 U8.10 | length 553.8
  Top Layer w10: U4.5 120.47,779.53 R8.1 125,776.97 158.03,810 234.2,810 260,784.2 260,770 270,760 410.18,760 465.92,704.26 v1(465.92,702.26) 490.16,678.03 U8.10
SDA6: R12.2 U6.6 U8.12 | length 1153.9
  Top Layer w10: v1(398,700) 398,662 423.11,636.89 U8.12 ; v1(753.8,1266.2) 756.48,1263.52 770.92,1263.52 772.13,1262.32 779.41,1262.32 U6.6@780.31,1261.42 ; R12.2 774.41,1267.32 U6.6@780.31,1261.42 ; U6.6 U6.6@780.31,1261.42
  Bottom Layer w10: v1(398,700) 395.32,702.68 395.32,714.68 320,790 320,1035.37 468.42,1183.8 678.02,1183.8 688.82,1173 737.14,1173 753.8,1189.65 v1(753.8,1266.2)
SDA7: R14.2 U7.6 U8.14 | length 1069
  Top Layer w10: R14.2 149.41,1323.03 137.68,1311.3 127.16,1311.3 120,1304.14 120,1280 137.68,1262.32 154.41,1262.32 155.32,1261.42 U7.6 ; v1(330,700) 330.41,699.59 330.41,682.22 356,656.63 356,606.63 373.1,589.53 U8.14
  Bottom Layer w10: v1(140,1320) 140,1250 160,1230 278.18,1230 297,1211.18 297,1188.82 286,1177.82 286,744 v1(330,700)
VIN: C9.2 C10.2 J1.4 U9.3 | length 472
  Bottom Layer w10: C9.2 440.43,313.43 U9.3 440.94,269.06 480,230 540,230 549.21,220.79 J1.4 ; C10.2 373.43,446.57 440,380 U9.3@440,340
pads on no net: U1.1 U1.6 U1.7 U2.1 U2.6 U2.7 U3.1 U3.6 U3.7 U4.1 U4.6 U4.7 U5.1 U5.6 U5.7 U6.3 U7.3 U8.16 U8.17

## Polygon pours and split planes (outlines as drawn)
GND on Bottom Layer "GND_L02_P000" (solid, pour order 0): 850,30 150,30 150,270 230,270 ccw(c230,370) 330,370 330,600 ccw(c230,600) 230,700 80,700 cw(c80,800) -20,800 -20,1680 cw(c50,1680) 50,1750 900,1750 cw(c900,1650) 1000,1650 1000,780 cw(c920,780) 920,700 760,700 ccw(c760,610) 670,610 670,370 ccw(c770,370) 770,270 850,270
GND on Top Layer "GND_L01_P003" (solid, pour order 3): 850,30 150,30 150,270 230,270 ccw(c230,370) 330,370 330,600 ccw(c230,600) 230,700 80,700 cw(c80,800) -20,800 -20,1680 cw(c50,1680) 50,1750 900,1750 cw(c900,1650) 1000,1650 1000,780 cw(c920,780) 920,700 760,700 ccw(c760,610) 670,610 670,370 ccw(c770,370) 770,270 850,270

## Silkscreen, mask and mechanical layers (free items; w line width, h text height)
Top Overlay:
  lines w6: 210,263 ccw(c186.67,435.2) 291.94,296.94 ; 292.77,297.76 ccw(c191.03,399.5) 334.91,399.5 335,575.86 ccw(c204.29,575.86) 296.72,668.28 290.51,674.49 ccw(c204.79,588.78) 204.79,710 80,710 cw(c80,806.57) 11.72,738.28 cw(c76.21,802.78) -15,802.78 -15,1680 cw(c45.36,1680) 2.68,1722.68 5,1725 cw(c41.21,1688.79) 41.21,1740 50,1740 910,1740 911.72,1740 cw(c911.72,1671.72) 960,1720 cw(c887.57,1647.57) 990,1647.57 990,770 cw(c941.72,770) 975.86,735.86 964.14,724.14 cw(c930,758.28) 930,710 780,710 ccw(c780,589.29) 694.64,674.64 ccw(c766.21,603.08) 665,603.08 665,425 ccw(c833.99,425) 714.5,305.5 721.46,298.54 ccw(c806.81,383.9) 806.81,263.19
Bottom Overlay:
  lines w6: 2.68,1722.68 ccw(c45.36,1680) -15,1680 -15,802.78 ccw(c76.21,802.78) 11.72,738.28 ccw(c80,806.57) 80,710 204.79,710 cw(c204.79,588.78) 290.51,674.49 ; 5,1725 cw(c41.21,1688.79) 41.21,1740 50,1740 910,1740 ; 291.94,296.94 cw(c186.67,435.2) 210,263 160,263 160,40 840.38,40 840.38,263.19 806.81,263.19 cw(c806.81,383.9) 721.46,298.54 ; 292.77,297.76 ccw(c191.03,399.5) 334.91,399.5 335,575.86 ccw(c204.29,575.86) 296.72,668.28 ; 911.72,1740 cw(c911.72,1671.72) 960,1720 cw(c887.57,1647.57) 990,1647.57 990,770 cw(c941.72,770) 975.86,735.86 964.14,724.14 cw(c930,758.28) 930,710 780,710 ccw(c780,589.29) 694.64,674.64 ccw(c766.21,603.08) 665,603.08 665,425 ccw(c833.99,425) 714.5,305.5 ; 290.51,674.49 ccw(c290.51,674.49) 290.51,674.49 ; 290.51,674.49 ccw(c290.51,674.49) 290.51,674.49 ; 290.51,674.49 296.72,668.28 ; 296.72,668.28 ccw(c296.72,668.28) 296.72,668.28 ; 714.5,305.5 ccw(c714.5,305.5) 714.5,305.5 ; 714.5,305.5 721.46,298.54 ; 721.46,298.54 ccw(c721.46,298.54) 721.46,298.54
  text "developed by shyam rajendran" at 968,1463 h50 r90
  text "3V3" at 268.19,136.01 h40 r89.51
  text "GND" at 760.19,135.98 h40 r91.16
  text "SDA" at 462.19,133.99 h40 r90.53
  text "VIN" at 563.19,133.99 h40 r90.64
  text "SCL" at 363.19,133 h40 r90
  text "RST" at 662.19,132.98 h40 r91.1